# Altium PCB dnt_mko.PcbDoc (part 2 of 2)
Units mm, origin at the board's own origin, x right, y up, seen from the top; angles counter-clockwise.
Board outline 128.25 x 60.25 mm, 6 copper layers (Top Layer, Signal Layer 1, Signal Layer 2, GND plane, Power layer, Bottom Layer), stack 1.5 mm thick; 122 components, 105 nets, 539 pads, 282 vias.
Unrouted connection lines stored in the file: 1.
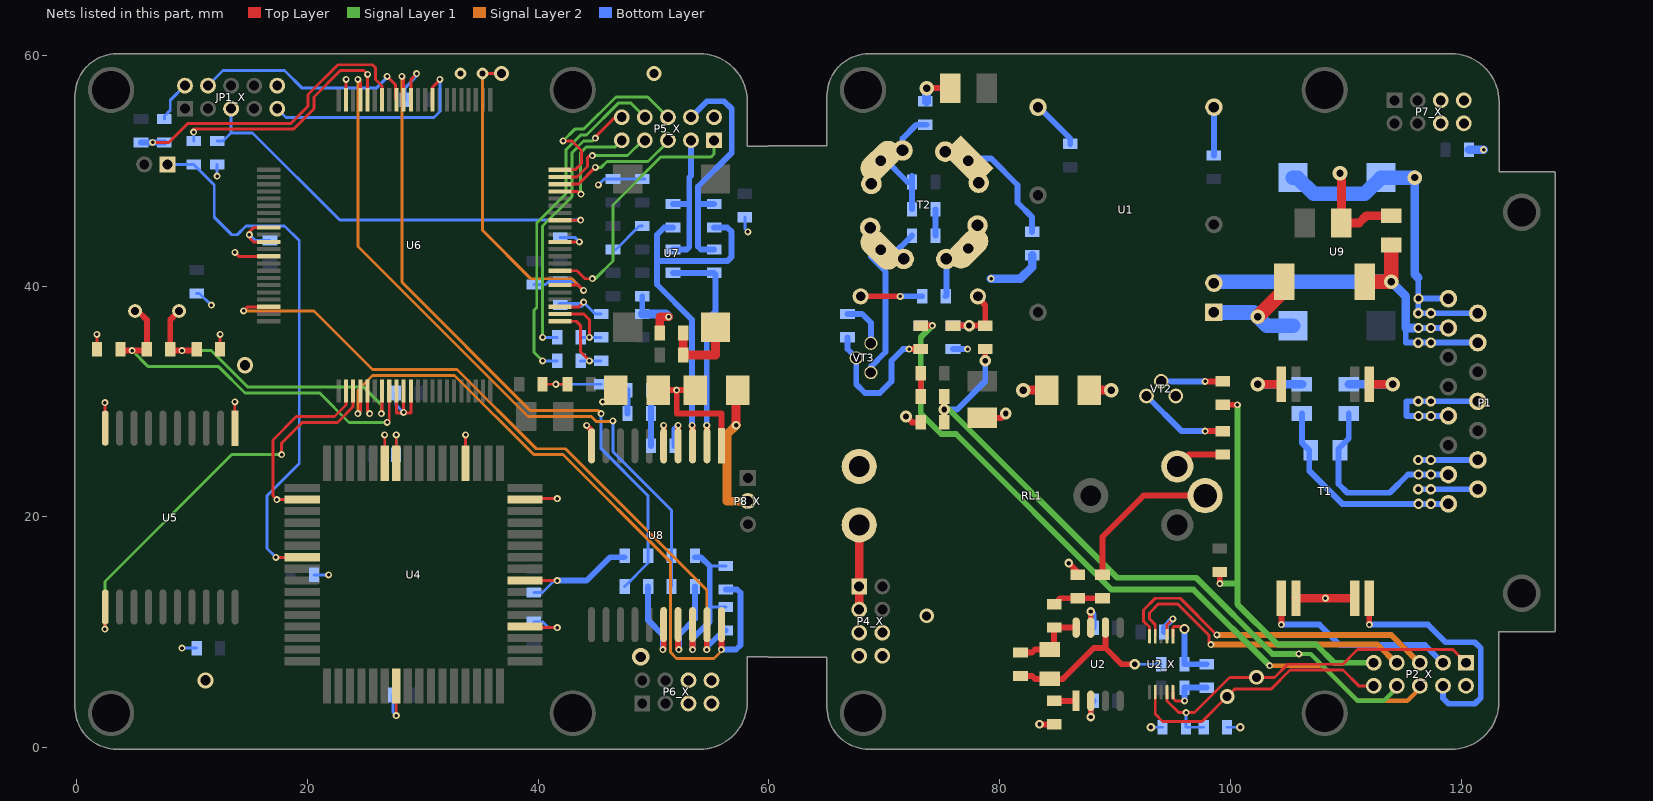
[diagram p6: the nets of this part, all layers, seen from the top]

## Via types
v1: diameter 0.61, hole 0.305, Top Layer to Bottom Layer, 176 vias
v2: diameter 0.889, hole 0.508, Top Layer to Bottom Layer, 31 vias
v3: diameter 1.524, hole 0.889, Top Layer to Bottom Layer, 22 vias
v4: diameter 1.27, hole 0.762, Top Layer to Bottom Layer, 12 vias
v5: diameter 0.762, hole 0.381, Top Layer to Bottom Layer, 10 vias
v6: diameter 1.27, hole 0.635, Top Layer to Bottom Layer, 10 vias
v7: diameter 1, hole 1, Top Layer to Bottom Layer, 9 vias
v8: diameter 1.016, hole 0.508, Top Layer to Bottom Layer, 5 vias
v9: diameter 1.27, hole 0.61, Top Layer to Bottom Layer, 3 vias
v10: diameter 1.397, hole 0.889, Top Layer to Bottom Layer, 2 vias
v11: diameter 3.048, hole 2.032, Top Layer to Bottom Layer, 1 vias
v12: diameter 1.016, hole 0.635, Top Layer to Bottom Layer, 1 vias

## Nets (pads, with @x,y where several pads share a name; then routed paths per layer and width w, separated by ;. In a path a pad name is that pad's centre, name@x,y a point inside that pad or via, vN(x,y) a via of type N, cw(c..) or ccw(c..) an arc to the next point about the centre after c; other vN are vias at no path point) (continued)
ALE: U5.11 U6.69 | length 36.3
  Top Layer w0.254: v1@2.466,10.234 v1(2.466,10.287) U5.11@2.466,12.694 ; v1(17.78,25.4) 17.78,26.416 19.558,28.194 22.606,28.194 23.972,29.56 U6.69@23.972,30.895
  Signal Layer 1 w0.254: v1(2.466,10.287) 2.466,14.404 13.462,25.4 v1(17.78,25.4)
BS+27: P1.8 P1.15 U9.11 U9.17 | length 31.3
  Bottom Layer w0.508: 116.256,40.716 v2(116.256,37.643) v2(117.348,37.643) P1.15@121.412,37.643 ; v2(116.281,38.913) P1.8@118.872,38.913
  Bottom Layer w0.762: v6(115.951,49.403) 115.951,41.021 116.256,40.716
  Bottom Layer w1.27: U9.11@105.41,49.403 105.791,49.403 107.188,48.006 111.633,48.006 U9.17@113.03,49.403 v6(115.951,49.403)
BS-27: C6.2 C46.1 P1.7 P1.14 U1.2 | length 36.6
  Top Layer w1.27: C6.2@111.633,40.386 v6(113.919,40.386) 113.919,43.434 C46.1@113.792,43.561
  Bottom Layer w0.508: 115.176,36.373 115.176,35.103 v2(116.256,35.103) v2(117.348,35.103) P1.14@121.412,35.103 ; v2@116.256,36.347 v2(116.281,36.373) v2(117.348,36.373) P1.7@118.872,36.373
  Bottom Layer w0.762: v6(113.919,40.386) 115.176,39.129 115.176,36.373 v2(116.281,36.373)
  Bottom Layer w1.27: U1.2@98.628,40.259 98.755,40.386 v6(113.919,40.386)
DNT_CURRENT: P2_X.10 U2_X.7 | length 23.5
  Top Layer w0.254: U2_X.7@93.472,4.826 93.472,2.921 94.107,2.286 97.536,2.286 v4(99.695,4.445) 100.33,5.08 103.505,5.08 105.156,6.731 109.728,6.731 111.093,5.366 P2_X.10@112.396,5.366
DNT_CURRENT_MK: P5_X.10 R29.1 | length 23.3
  Top Layer w0.254: v1(44.958,52.832) 44.958,52.926 P5_X.10@46.61,54.578
  Signal Layer 1 w0.254: v1(40.386,35.56) 40.386,45.212 42.926,47.752 42.926,51.562 43.942,52.578 44.704,52.578 v1(44.958,52.832)
  Bottom Layer w0.254: v1(40.386,35.56) R29.1@41.656,35.56
GEN: C31.2 P2_X.6 R25.1 | length 63.5
  Top Layer w0.508: C31.2@73.152,36.576 v1(74.168,36.576)
  Signal Layer 1 w0.508: v1(74.168,36.576) 73.152,35.56 73.152,28.956 74.93,27.178 76.2,27.178 89.662,13.716 96.774,13.716 v1(103.378,7.112)
  Signal Layer 2 w0.381: v1(103.378,7.112) 107.95,7.112 110.998,4.064 115.316,4.064 115.999,4.747
  Bottom Layer w0.508: R25.1@73.152,36.576 v1(74.168,36.576)
GEN_MK: P5_X.6 U6.22 | length 16.5
  Top Layer w0.254: U6.22@41.91,50.082 43.224,50.082 43.764,50.622 43.764,51.74 42.926,52.578 v1(42.164,52.578)
  Signal Layer 1 w0.254: v1(42.164,52.578) 43.18,53.594 43.942,53.594 46.736,56.388 49.491,56.388 P5_X.6@51.245,54.634
GND: C7.2 C8.1 C9.2 C10.2 C11.1 C12.1 C13.1 C14.1 C15.1 C16.1 C17.1 C18.1 C19.1 C20.1 C21.2 C22.2 C23.2 C24.2 C25.2 C26.2 C33.1 C34.1 C35.1 C36.1 C37.1 C38.1 C39.1 C40.2 C41.2 C42.2 C43.1 C44.1 C45.2 C47.1 C48.2 JP1_X.2 JP1_X.10 L2.1 P2_X.2 P4_X.5 P4_X.6 P4_X.7 P4_X.8 P5_X.2 P6_X.5 P6_X.6 P6_X.7 P6_X.8 P7_X.5 P7_X.6 P7_X.7 P7_X.8 R2.1 R4.1 R16.1 R17.2 R33.1 R36.1 R40.2 R44.2 R45.2 RL1.1 T1.2 T1.3 U2.2 U2.7 U2_X.2 U2_X.10 U4.15 U4.28 U4.32 U4.39 U4.44 U4.50 U4.51 U5.1 U5.10 U6.3 U6.12 U6.34 U6.43 U6.53 U6.55 U6.57 U6.71 U6.75 U6.76 U6.77 U8.5 U8.10 U8.18 VT2.1 | length 154.4
  Top Layer w0.254: C12.1@1.778,34.544 v1(1.778,35.814) ; U5.10@2.466,27.686 v1(2.466,29.898) ; C13.1@12.446,34.544 v1(12.446,35.814) v1@12.446,35.839 ; U5.1@13.716,27.686 v1(13.716,29.972) ; v1(13.716,42.926) 14.06,42.582 U6.57@16.66,42.582 ; U6.55@16.66,43.832 15.35,43.832 14.986,44.196 v1(14.986,44.45) 14.986,44.704 15.364,45.082 U6.53@16.66,45.082 ; U6.43@23.347,56.145 23.347,57.891 v1(23.368,57.912) ; U6.71@25.222,30.895 25.222,29.134 v1(25.4,28.956) ; U4.51@26.708,24.653 v1(26.708,27.104) ; v1(27.708,2.794) U4.15@27.708,5.353 ; U4.50@27.708,24.653 v1(27.708,27.104) ; U6.75@27.722,30.895 27.722,28.992 28.972,28.992 U6.77@28.972,30.895 ; v1(28.347,29.057) U6.76@28.347,30.895 ; U6.34@28.972,56.145 28.972,57.885 v1@29.464,58.376 ; U4.44@33.708,24.653 v1(33.708,27.104) ; U4.28@38.858,10.503 38.947,10.414 v1(41.656,10.414) ; U4.32@38.858,14.503 38.883,14.478 v1(41.656,14.478) ; U4.39@38.858,21.503 38.945,21.59 v1(41.656,21.59) ; C15.1@40.386,31.496 v1(41.529,31.496) C14.1@42.545,31.496 C14.1@42.672,31.496 ; U6.3@41.91,38.207 43.541,38.207 v1(43.942,38.608) ; U6.12@41.91,43.832 v1(43.578,43.832) ; U2_X.2@94.488,9.652 94.488,10.668 v1(94.996,11.176) ; U2_X.10@94.996,4.826 94.996,4.318 95.25,4.064 v1(96.012,4.064)
  Top Layer w0.508: v1(44.196,27.94) 44.63,27.506 U8.10@44.63,26.162 ; C42.2@45.974,30.988 C42.2@46.736,30.988 ; U8.5@50.88,26.162 v1@50.88,27.86 ; v1(53.38,8.509) U8.18@53.38,10.67 U8.18@53.38,11.17 ; v5(83.439,2.032) R40.2@84.709,2.032 ; v5(85.979,16.002) 86.741,15.24 C44.1@86.741,14.986 ; v5(87.884,2.667) U2.2@87.884,4.064 ; U2.7@87.884,10.414 v5(87.884,11.811)
  Top Layer w0.762: R16.1@50.546,36.068 50.546,37.338 v1(51.308,37.338) ; L2.1@87.757,30.988 v6(89.662,30.988) ; T1.3@105.664,12.954 v1(108.204,12.954) T1.2@110.744,12.954
  Bottom Layer w0.254: R33.1@7.62,54.483 7.62,54.737 8.128,55.245 8.128,56.102 JP1_X.2@9.398,57.372 ; v1(9.144,8.636) C21.2@10.414,8.636 ; C37.1@10.414,39.37 10.668,39.37 v1(11.684,38.354) ; v1(12.192,49.53) C26.2@12.192,50.546 ; v1(14.986,44.45) 15.494,43.942 C19.1@16.764,43.942 ; C36.1@20.574,14.986 v1(21.844,14.986) ; C35.1@27.432,4.572 27.432,3.07 v1(27.708,2.794) ; C18.1@27.686,30.734 27.686,29.718 v1(28.347,29.057) ; C16.1@27.708,25.422 v1(27.708,27.104) ; C20.1@28.448,56.134 28.448,57.15 29.464,58.166 v1(29.464,58.42) ; C34.1@39.624,10.922 40.386,10.922 40.894,10.414 v1(41.656,10.414) ; C33.1@39.624,13.462 40.386,13.462 41.427,14.503 41.453,14.478 v1(41.656,14.478) ; v1(41.529,31.496) C39.1@45.466,31.496 ; C17.1@41.91,44.196 43.214,44.196 v1(43.578,43.832) ; v1(43.942,38.608) 44.958,37.592 C40.2@45.466,37.592 ; v1(45.212,48.768) 45.72,49.276 C25.2@46.482,49.276 R17.2@49.022,49.276 R17.2@49.276,49.276 ; 54.864,12.065 54.991,12.192 R45.2@56.261,12.192 ; 54.864,15.748 R44.2@56.261,15.748 ; C22.2@57.912,45.974 57.912,44.958 v1(58.166,44.704) ; v5(93.091,1.778) C48.2@94.107,1.778 ; C47.1@99.695,1.778 v5(100.838,1.778)
  Bottom Layer w0.508: JP1_X.2@9.112,57.372 JP1_X.2@9.398,57.372 ; v1(41.656,14.478) 44.196,14.478 46.228,16.51 R2.1@47.498,16.51 ; C45.2@41.91,38.354 43.688,38.354 v1(43.942,38.608) ; v1(45.593,29.972) 47.752,29.972 ; C38.1@47.752,28.956 47.752,29.972 ; C8.1@47.752,30.988 47.752,29.972 ; C23.2@49.022,37.592 C24.2@49.022,39.116 ; v1(53.38,8.509) 53.38,9.438 54.864,10.922 54.864,12.065 54.864,15.748 54.102,16.51 R4.1@53.594,16.51 ; v5(87.884,2.667) 87.884,3.81 C10.2@88.138,4.064 ; v5(87.884,11.811) 88.138,11.557 C9.2@88.138,10.414 ; C11.1@94.234,10.033 94.234,10.414 v1(94.996,11.176) ; v1(96.012,4.064) C7.2@96.012,5.207 C43.1@97.917,5.207
  Bottom Layer w0.762: C23.2@49.022,37.592 51.054,37.592 v1(51.308,37.338) ; C41.2@120.65,51.816 v1(121.92,51.816)
  other v1: 50.88,27.94
  other v3: 48.895,7.874
  other v4: 73.66,11.43 50.038,58.42
  other v10: 11.176,5.842 14.605,33.147
GND_PWR: C1.1 C2.2 C3.2 C4.1 C27.1 C28.2 C29.2 C32.1 C46.2 L2.2 R26.1 R38.1 U1.4 U1.5 VT3.1 | length 35.9
  Top Layer w0.508: v8(71.882,28.702) 72.39,28.194 C27.1@73.152,28.194 ; v6(73.66,57.15) C4.1@75.692,57.15 ; C28.2@78.486,28.575 80.137,28.575 v8(80.518,28.956)
  Top Layer w0.762: v6(82.042,30.988) L2.2@84.074,30.988 ; C2.2@109.601,45.466 111.125,45.466 111.76,46.101 C46.2@113.792,46.101 ; C2.2@109.601,45.72 v6@109.601,49.657
  Bottom Layer w0.508: R26.1@66.802,37.592 68.072,37.592 68.834,36.83 VT3.1@68.834,35.052 ; C32.1@75.946,34.544 v1(77.216,34.544) ; U1.5@83.388,55.499 86.106,52.781 C3.2@86.106,52.324 ; C1.1@98.552,51.308 U1.4@98.552,55.423
  Bottom Layer w0.762: C29.2@73.66,56.007 v6@73.66,57.023 ; v1(79.248,40.64) 81.788,40.64 82.804,41.656 R38.1@82.804,42.672
  other v6: 109.474,49.784
IND50V: C27.2 P2_X.8 R19.2 R20.1 | length 59.9
  Top Layer w0.508: C27.2@75.184,28.194 v8(75.184,29.312) R19.2@75.184,30.429 ; v8(78.74,33.528) R20.1@78.74,34.544
  Signal Layer 1 w0.381: v1(105.918,8.128) 106.934,8.128 110.998,4.064 113.284,4.064 114.396,5.176 P2_X.8@114.396,5.366
  Signal Layer 1 w0.508: v8(75.184,29.312) 75.59,29.312 90.17,14.732 97.028,14.732 103.632,8.128 v1(105.918,8.128)
  Bottom Layer w0.508: v8(75.184,29.312) 76.302,29.312 78.74,31.75 v8(78.74,33.528)
IND50V_MK: P5_X.8 R28.1 | length 30.1
  Signal Layer 1 w0.254: v1(40.386,33.528) 39.624,34.29 39.624,37.89 39.878,38.144 39.878,45.466 42.418,48.006 42.418,51.816 43.688,53.086 44.188,53.086 46.982,55.88 48.006,55.88 P5_X.8@49.248,54.638
  Bottom Layer w0.254: v1(40.386,33.528) R28.1@41.656,33.528
INPUT: P4_X.1 P4_X.3 RL1.2 | length 7.3
  Top Layer w0.762: P4_X.3@67.818,11.97 P4_X.1@67.818,13.97 RL1.2@67.818,19.304
KS: P1.4 P1.12 | length 11.1
  Bottom Layer w0.508: P1.4@118.872,28.753 v2(117.348,28.753) v2(116.281,28.753) 115.24,28.753 115.24,30.023 v2(116.256,30.023) v2(117.348,30.023) P1.12@121.412,30.023
KU0: P2_X.7 U2_X.4 | length 26.4
  Top Layer w0.254: U2_X.4@93.472,9.652 93.472,10.668 92.964,11.176 92.964,11.684 93.726,12.446 95.421,12.446 98.12,9.746 98.12,9.119 v1(98.298,8.941)
  Signal Layer 2 w0.508: v1(98.298,8.941) 112.725,8.941 P2_X.7@114.348,7.318
KU0_MK: P5_X.7 U6.21 | length 8.8
  Top Layer w0.254: U6.21@41.91,49.457 43.361,49.457 44.272,50.368 44.272,51.13 44.397,51.255
  Signal Layer 1 w0.254: v1(44.704,51.308) 47.752,51.308 49.078,52.634 P5_X.7@49.245,52.634
KU1: P2_X.5 U2_X.5 | length 29.2
  Top Layer w0.254: U2_X.5@92.964,9.652 92.964,10.458 92.456,10.966 92.456,11.938 93.472,12.954 95.631,12.954 v1(98.806,9.779)
  Signal Layer 2 w0.508: v1(98.806,9.779) 113.919,9.779 P2_X.5@116.364,7.334
KU1_MK: P5_X.5 U6.20 | length 11
  Top Layer w0.254: U6.20@41.91,48.832 43.498,48.832 v1(44.958,50.292)
  Signal Layer 1 w0.254: v1(44.958,50.292) 45.466,50.292 45.974,50.8 49.53,50.8 51.245,52.515 P5_X.5@51.245,52.634
M_RXD0: R4.2 R9.1 U6.41 | length 61.2
  Top Layer w0.254: v1(24.384,57.912) 24.597,57.699 U6.41@24.597,56.145
  Signal Layer 2 w0.254: v1(24.384,57.912) 24.384,43.434 39.116,28.702 44.602,28.702 45.034,28.27 46.431,28.27 v1(46.482,28.321)
  Bottom Layer w0.254: v1(46.482,28.321) 46.482,25.654 51.562,20.574 R4.2@51.562,16.637 R9.1@51.562,13.97
M_RXDN0: R2.2 R6.1 U6.35 | length 59.6
  Top Layer w0.254: v1(28.194,58.166) 28.247,58.166 28.347,58.267 U6.35@28.347,56.145
  Signal Layer 2 w0.254: v1(28.194,58.166) 28.194,40.342 39.326,29.21 45.212,29.21 v1(45.466,28.956)
  Bottom Layer w0.254: v1(45.466,28.956) 45.466,25.908 49.53,21.844 R2.2@49.53,16.637 49.53,16.002 R6.1@47.498,13.97
M_TXD0: R45.1 U6.64 U8.19 | length 62.3
  Top Layer w0.254: v1(14.478,37.846) 14.839,38.207 U6.64@16.66,38.207
  Top Layer w0.508: v1(54.61,8.509) 54.61,10.65 U8.19@54.63,10.67
  Signal Layer 2 w0.254: v1(14.478,37.846) 20.574,37.846 25.654,32.766 32.976,32.766 39.834,25.908 42.374,25.908 54.61,13.672 v1(54.61,8.509)
  Bottom Layer w0.5: v1(54.61,8.509) 54.631,8.53 54.631,8.72 56.07,10.16 R45.1@56.261,10.16
M_TXDN0: R44.1 U6.70 U8.20 | length 61.1
  Top Layer w0.254: v1(24.384,28.956) 24.597,29.169 U6.70@24.597,30.895
  Top Layer w0.508: v1(55.88,8.509) U8.20@55.88,10.67
  Signal Layer 2 w0.254: v1(24.384,28.956) 24.384,30.988 25.654,32.258 32.766,32.258 39.624,25.4 42.164,25.4 51.486,16.078 51.486,8.25 51.989,7.747 55.245,7.747 55.88,8.382 v1(55.88,8.509)
  Bottom Layer w0.5: v1(55.88,8.509) 57.15,8.509 57.531,8.89 57.531,13.423 57.238,13.716 R44.1@56.261,13.716
MKO_1: P5_X.3 R42.2 R43.2 | length 12.2
  Bottom Layer w0.5: R43.2@51.689,43.18 52.872,43.18 53.086,43.394 53.086,47.117 ; R42.2@51.689,47.117 53.086,47.117 ; P5_X.3@53.245,52.634 53.245,49.562 53.086,49.403 53.086,47.117
MKO_1_OA: P2_X.3 T1.4 | length 17.6
  Top Layer w0.508: v1(104.394,10.668) T1.4@104.394,12.954
  Bottom Layer w0.508: v1(104.394,10.668) 107.696,10.668 109.474,8.89 116.84,8.89 P2_X.3@118.38,7.35
MKO_2: P5_X.4 R41.2 R46.2 | length 20.4
  Bottom Layer w0.5: P5_X.4@53.245,54.634 54.618,56.007 56.134,56.007 56.769,55.372 56.769,51.562 53.848,48.641 53.848,47.117 ; R46.2@55.245,43.18 54.102,43.18 53.848,43.434 53.848,47.117 ; R41.2@55.245,47.117 53.848,47.117
MKO_2_OA: P2_X.4 T1.1 | length 21.9
  Top Layer w0.508: v1(112.014,10.668) T1.1@112.014,12.954
  Bottom Layer w0.508: v1(112.014,10.668) 117.094,10.668 118.618,9.144 121.158,9.144 121.666,8.636 121.666,4.318 121.158,3.81 118.872,3.81 118.396,4.286 P2_X.4@118.396,5.366
MKO_N: P1.1 R5.2 R10.2 | length 18.5
  Bottom Layer w0.508: R5.2@106.172,28.956 106.172,26.416 106.807,25.781 106.807,24.003 109.677,21.133 v2(116.281,21.133) v2(117.348,21.133) P1.1@118.872,21.133
MKO_N_R: P1.9 | length 5.2
  Bottom Layer w0.508: v2(116.256,22.403) v2(117.348,22.403) P1.9@121.412,22.403
MKO_P: P1.2 R10.1 R30.2 | length 17
  Bottom Layer w0.508: R30.2@110.236,28.956 110.236,26.797 109.347,25.908 109.347,22.86 110.109,22.098 113.792,22.098 115.367,23.673 v2(116.281,23.673) v2(117.348,23.673) P1.2@118.872,23.673
  Bottom Layer w1.27: P1.2@118.821,23.622 P1.2@118.872,23.673
MKO_P_R: P1.10 | length 5.2
  Bottom Layer w0.508: v2(116.256,24.943) v2(117.348,24.943) P1.10@121.412,24.943
NetC5_1: C5.1 R3.2 R39.2 U2.6 | length 15.8
  Top Layer w0.508: C5.1@81.788,6.223 82.804,6.223 83.058,5.969 R3.2@84.328,5.969 85.471,5.969 88.138,8.636 89.154,8.636 ; U2.6@89.154,10.414 89.154,8.636 ; v2(91.694,7.239) 90.551,7.239 89.154,8.636
  Bottom Layer w0.254: v2(91.694,7.239) R39.2@93.98,7.239
NetC5_2: C5.2 R3.1 R8.2 U2.8 | length 6.6
  Top Layer w0.508: C5.2@81.788,8.255 82.804,8.255 83.058,8.509 R3.1@84.328,8.509 84.709,8.89 R8.2@84.709,10.414 U2.8@86.614,10.414
NetC6_1: C6.1 U1.1 U9.8 | length 11.5
  Top Layer w1.27: v6(102.362,37.338) 104.648,39.624 C6.1@104.648,40.386 C6.1@104.648,40.64
  Bottom Layer w1.27: U1.1@98.628,37.719 101.981,37.719 v6(102.362,37.338) 103.124,36.576 U9.8@105.41,36.576
NetC12_2: C12.2 Q1.1 R11.2 U6.74 | length 33.7
  Top Layer w0.254: Q1.1@5.08,37.846 Q1.1@5.334,37.846 ; v1(26.924,28.194) 27.102,28.372 27.102,30.89 U6.74@27.097,30.895
  Top Layer w0.508: C12.2@3.81,34.417 v1(4.826,34.417) 6.096,34.417 R11.2@6.096,34.544 6.096,37.084 Q1.1@5.334,37.846
  Signal Layer 1 w0.254: v1(4.826,34.417) 6.223,33.02 12.319,33.02 14.605,30.734 21.082,30.734 23.622,28.194 v1(26.924,28.194)
NetC13_2: C13.2 Q1.2 R11.1 U6.73 | length 28.1
  Top Layer w0.254: v1(26.416,28.956) 26.472,29.012 U6.73@26.472,30.895
  Top Layer w0.508: Q1.2@8.89,37.846 8.128,37.084 R11.1@8.128,34.544 8.128,34.417 v1(9.144,34.417) C13.2@10.516,34.417
  Signal Layer 1 w0.254: v1(9.144,34.417) 11.684,34.417 14.859,31.242 24.892,31.242 26.416,29.718 v1(26.416,28.956)
NetC29_1: C29.1 C30.1 R21.2 T2.2 | length 10.9
  Bottom Layer w0.508: T2.2@68.834,51.054 69.977,51.054 72.009,49.022 R21.2@72.39,49.022 ; T2.2@71.57,51.754 71.57,52.774 72.771,53.975 C29.1@73.533,53.975 C29.1@73.66,53.975 ; C30.1@72.39,46.66 R21.2@72.39,49.022 ; R21.2@72.39,49.53 R21.2@72.39,49.022
NetC30_2: C30.2 R23.1 | length 2.3
  Bottom Layer w0.508: R23.1@74.422,44.374 C30.2@74.422,46.66
NetC31_1: C31.1 R25.2 R26.2 VT3.2 | length 13.9
  Top Layer w0.508: v1(72.136,34.544) C31.1@73.152,34.544
  Bottom Layer w0.508: R26.2@66.802,35.56 66.802,34.544 VT3.2@67.564,33.782 67.564,31.496 68.326,30.734 69.596,30.734 70.612,31.75 70.612,33.528 71.628,34.544 v1(72.136,34.544) R25.2@73.152,34.544
NetC32_2: C32.2 R20.2 R27.2 VD3.1 | length 7
  Top Layer w0.508: R27.2@75.946,36.576 v8(77.343,36.576) R20.2@78.74,36.576 78.74,38.354 VD3.1@77.978,39.116
  Bottom Layer w0.508: C32.2@75.946,36.576 v8(77.343,36.576)
NetC39_2: C39.2 R28.2 U6.1 | length 7.1
  Top Layer w0.254: U6.1@41.91,36.957 43.297,36.957 43.688,36.566 43.688,34.29 v1(44.45,33.528)
  Bottom Layer w0.254: R28.2@43.688,33.528 v1(44.45,33.528) C39.2@45.466,33.528
NetC40_1: C40.1 R29.2 U6.2 | length 6
  Top Layer w0.254: U6.2@41.91,37.582 43.952,37.582 44.45,37.084 v1(44.45,35.56)
  Bottom Layer w0.254: R29.2@43.688,35.56 v1(44.45,35.56) C40.1@45.466,35.56
NetC43_2: C43.2 R39.1 U2_X.1 | length 6.8
  Top Layer w0.254: U2_X.1@94.996,9.652 94.996,10.414 95.072,10.49 95.682,10.49 95.885,10.287 v2(96.012,10.287)
  Bottom Layer w0.508: v2(96.012,10.287) R39.1@96.012,7.239 C43.2@97.917,7.239
NetC44_2: C44.2 R7.1 R8.1 | length 4.4
  Top Layer w0.508: R8.1@84.709,12.446 85.217,12.954 C44.2@86.741,12.954 R7.1@88.9,12.954
NetL3_1: L3.1 P8_X.2 | length 11.6
  Top Layer w0.762: v5(57.15,27.94) L3.1@57.15,30.861
  Signal Layer 2 w0.762: v5(57.15,27.94) 56.356,27.146 56.356,21.368 P8_X.2@58.166,21.368
NetR1_1: R1.1 U8.4 | length 3.6
  Top Layer w0.508: U8.4@52.13,26.162 v1@52.13,27.88
  Bottom Layer w0.508: R1.1@51.816,26.162 51.816,27.626 v1(52.13,27.94)
NetR5_1: R5.1 T1.5 | length 5.8
  Top Layer w0.762: v6(102.362,31.496) T1.5@104.394,31.496
  Bottom Layer w0.762: v6(102.362,31.496) R5.1@106.172,31.496
NetR6_2: R6.2 U8.16 | length 8.2
  Top Layer w0.508: v1(50.8,8.509) 50.88,8.589 U8.16@50.88,10.67
  Bottom Layer w0.508: R6.2@49.53,13.97 49.53,11.049 50.8,9.779 v1(50.8,8.509)
NetR7_2: R7.2 RL1.3 | length 13.7
  Top Layer w0.508: R7.2@88.9,14.986 88.9,18.288 92.456,21.844 RL1.3@97.79,21.844
NetR9_2: R9.2 U8.17 | length 8.7
  Top Layer w0.508: U8.17@52.13,11.17 U8.17@52.13,10.67 52.13,8.576 v1(52.197,8.509)
  Bottom Layer w0.508: v1(52.197,8.509) 52.197,9.779 53.594,11.176 R9.2@53.594,13.97
NetR13_2: R13.2 R16.2 U7.17 | length 7.5
  Top Layer w0.762: R13.2@52.578,33.782 R13.2@52.578,34.036 ; R16.2@52.578,36.068 R16.2@52.578,35.941 R13.2@52.578,34.036 ; U7.17@55.372,36.449 55.372,34.036 R13.2@52.578,34.036
NetR14_2: R14.2 R15.1 | length 3.4
  Bottom Layer w0.254: R15.1@46.482,43.18 46.736,43.18 48.768,45.212 R14.2@49.022,45.212
NetR18_2: R18.2 R19.1 | length 2
  Top Layer w0.508: R19.1@73.152,30.429 R18.2@73.152,32.461
NetR22_1: R22.1 U6.40 | length 21.1
  Top Layer w0.254: v1(10.16,53.34) 10.16,53.594 18.796,53.594 20.574,55.372 20.574,56.388 22.86,58.674 24.892,58.674 v1(25.222,58.344) U6.40@25.222,56.145
  Bottom Layer w0.254: R22.1@10.16,52.578 v1(10.16,53.34)
NetR23_2: R23.2 T2.3 VT3.3 | length 15.4
  Bottom Layer w0.508: VT3.3@68.834,32.512 68.834,33.02 70.104,34.29 70.104,41.275 68.834,42.545 70.561,42.545 R23.2@72.39,44.374
NetR24_2: R24.2 R33.2 U6.38 | length 27.8
  Top Layer w0.254: v1(6.604,52.451) 8.001,52.451 9.652,54.102 18.586,54.102 20.066,55.582 20.066,56.598 22.65,59.182 25.654,59.182 25.908,58.928 25.908,58.628 ; 25.908,58.628 25.908,58.059 25.908,57.912 26.472,57.348 U6.38@26.472,56.145
  Bottom Layer w0.508: R24.2@5.588,52.451 v1(6.604,52.451) R33.2@7.62,52.451
NetR30_1: R30.1 T1.8 | length 5.8
  Top Layer w0.762: T1.8@112.014,31.496 v6(114.046,31.496)
  Bottom Layer w0.762: R30.1@110.236,31.496 v6(114.046,31.496)
NetR31_1: R31.1 RL1.B | length 4.4
  Top Layer w0.508: RL1.B@95.377,24.384 96.393,25.4 R31.1@99.314,25.4
NetR31_2: R31.2 VT2.3 | length 7.9
  Top Layer w0.508: v1(97.79,27.432) R31.2@99.314,27.432
  Bottom Layer w0.508: VT2.3@92.71,30.48 95.758,27.432 v1(97.79,27.432)
NetR34_1: R34.1 VT2.2 | length 5.3
  Top Layer w0.508: v1(97.79,31.75) R34.1@99.314,31.75
  Bottom Layer w0.508: VT2.2@93.98,31.75 v1(97.79,31.75)
NetR37_1: R37.1 VD3.2 | length 5.5
  Top Layer w0.508: VD3.2@67.818,39.116 VD3.2@67.945,39.116 v1(71.374,39.116)
  Bottom Layer w0.508: v1(71.374,39.116) R37.1@73.279,39.116
NetR37_2: R37.2 T2.4 | length 3.4
  Bottom Layer w0.508: R37.2@75.311,39.116 75.37,39.175 T2.4@75.37,42.354 ; T2.4@77.47,42.545 T2.4@77.597,42.672
NetR38_2: R38.2 T2.1 | length 9.6
  Bottom Layer w0.508: T2.1@77.47,51.054 79.248,51.054 81.534,48.768 81.534,47.244 82.804,45.974 R38.2@82.804,44.704
NetR40_1: R40.1 U2.1 | length 1.7
  Top Layer w0.508: R40.1@84.963,4.064 U2.1@86.614,4.064
NetR41_1: R41.1 R42.1 U8.3 | length 31.6
  Top Layer w0.508: U8.3@53.38,26.162 v1@53.38,27.9
  Bottom Layer w0.508: R42.1@51.689,45.085 50.927,45.085 50.292,44.45 50.292,42.164 ; v1(53.34,27.94) 53.34,37.084 50.292,40.132 50.292,42.164 ; R41.1@55.245,45.085 56.388,45.085 56.769,44.704 56.769,42.545 56.388,42.164 50.292,42.164
NetR43_1: R43.1 R46.1 U8.2 | length 18.9
  Top Layer w0.508: U8.2@54.63,26.162 v1@54.63,27.92
  Bottom Layer w0.508: R43.1@51.689,41.148 R46.1@55.245,41.148 55.372,41.021 55.372,37.846 54.61,37.084 v1(54.61,27.94)
RXD1: JP1_X.9 U6.31 | length 19.5
  Top Layer w0.254: U6.31@30.847,56.145 30.847,57.238 31.496,57.887 v1(31.496,57.912)
  Bottom Layer w0.254: JP1_X.9@17.398,55.372 18.16,54.61 30.988,54.61 31.496,55.118 v1(31.496,57.912)
TEMP_1: C45.1 R32.1 R36.2 U6.6 | length 33.1
  Top Layer w0.254: R36.2@35.179,58.42 v4(36.83,58.42) ; U6.6@41.91,40.082 43.484,40.082 v1(43.942,39.624)
  Signal Layer 2 w0.254: R36.2@35.179,58.42 35.179,44.831 39.37,40.64 42.926,40.64 v1(43.942,39.624)
  Bottom Layer w0.254: R32.1@39.624,40.132 40.64,40.132 40.894,40.386 C45.1@41.91,40.386 43.18,40.386 v1(43.942,39.624)
TXD1: JP1_X.4 U6.36 | length 19.8
  Top Layer w0.254: v1(26.924,58.166) 27.658,57.432 27.658,56.209 U6.36@27.722,56.145
  Bottom Layer w0.254: JP1_X.4@11.398,57.118 JP1_X.4@11.398,57.372 12.7,58.674 18.034,58.674 19.558,57.15 25.981,57.15 26.924,58.093 v1(26.924,58.166)
UNLOCK: P2_X.9 R34.2 R35.2 | length 35
  Top Layer w0.508: v1(99.06,14.224) R35.2@99.06,15.24 ; R34.2@99.314,29.718 v1(100.584,29.718)
  Signal Layer 1 w0.508: v1(99.06,14.224) 100.584,14.224 ; v1(100.584,29.718) 100.584,14.224 ; P2_X.9@112.396,7.366 108.966,7.366 107.391,8.941 104.089,8.941 100.584,12.446 100.584,14.224
UNLOCK_MK: P5_X.9 U6.19 | length 9.5
  Top Layer w0.254: U6.19@41.91,48.207 43.487,48.207 v1(43.714,47.98)
  Signal Layer 1 w0.254: v1(43.714,47.98) 43.688,48.006 43.688,51.562 44.196,52.07 46.681,52.07 P5_X.9@47.245,52.634
V_MID_MK: P5_X.1 U6.8 | length 22.1
  Top Layer w0.254: U6.8@41.91,41.332 43.377,41.332 44.069,40.64 v1(44.704,40.64)
  Signal Layer 1 w0.254: v1(44.704,40.64) 44.958,40.64 46.482,42.164 46.482,47.034 50.629,51.181 54.991,51.181 55.245,51.435 P5_X.1@55.245,52.634
V_mid_OA: C47.2 C48.1 P2_X.1 U2_X.9 | length 32.6
  Top Layer w0.254: U2_X.9@94.488,4.826 94.488,4.064 95.504,3.048 v1(96.139,3.048) 96.861,3.048 99.909,6.096 v4(102.235,6.096) 103.803,6.096 104.946,7.239 109.728,7.239 110.998,8.509 119.253,8.509 P2_X.1@120.396,7.366
  Bottom Layer w0.254: v1(96.139,3.048) C48.1@96.139,1.778 C47.2@97.663,1.778
VCC: C8.2 C38.2 C42.1 L3.2 R1.2 U8.1 | length 18.9
  Top Layer w0.508: C42.1@50.419,30.988 v1(52.006,30.988) ; L3.2@53.594,30.988 v1(52.006,30.988) ; U8.1@55.88,26.162 55.88,28.956 52.006,28.956 v1(52.006,30.988)
  Bottom Layer w0.508: R1.2@49.784,26.162 C38.2@49.784,28.956 C8.2@49.784,30.988 v1(52.006,30.988)
~RD: U4.58 U6.68 | length 16.3
  Top Layer w0.254: U4.58@19.558,21.503 v1(17.359,21.503) 17.018,21.844 17.018,26.67 19.05,28.702 22.352,28.702 23.347,29.697 U6.68@23.347,30.895
~RST: C26.1 JP1_X.5 U6.15 | length 38.8
  Top Layer w0.254: U6.15@41.91,45.707 43.701,45.707 v1(43.688,45.72)
  Bottom Layer w0.254: C26.1@12.192,52.578 12.7,52.578 13.398,53.276 ; JP1_X.5@13.398,55.372 13.398,53.276 ; v1(43.688,45.72) 22.816,45.72 15.26,53.276 13.398,53.276
~WR: P3_X.1 R22.2 U4.63 | length 47.6
  Top Layer w0.254: v1(17.279,16.503) U4.63@19.558,16.503
  Bottom Layer w0.254: P3_X.1@7.874,50.546 R22.2@10.16,50.546 11.938,48.768 11.938,45.974 13.462,44.45 13.924,44.45 14.686,45.212 18.034,45.212 19.304,43.942 19.304,24.638 16.51,21.844 16.51,17.272 v1(17.279,16.503)
pads on no net: JP1_X.1 JP1_X.3 JP1_X.6 JP1_X.7 JP1_X.8 P1.0 P1.3 P1.5 P1.6 P1.11 P1.13 RL1.0 T1.6 T1.7 U1.7 U4.9 U4.10 U4.11 U4.12 U4.13 U4.14 U4.18 U4.22 U4.23 U4.24 U4.25 U4.26 U4.41 U4.42 U4.43 U4.46 U4.47 U4.48 U4.49 U4.53 U4.54 U4.55 U4.56 U4.57 U4.64 U6.4 U6.5 U6.7 U6.9 U6.14 U6.16 U6.17 U6.18 U6.23 U6.24 U6.25 U6.26 U6.27 U6.28 U6.29 U6.30 U6.32 U6.37 U6.39 U6.42 U6.44 U6.45 U6.54 U6.72 U6.79 U6.80 U6.81 U6.82 U6.83 U6.84 U6.85 U6.87 U6.88 U8.6 U8.7 U8.8 U8.9 U8.11 U8.12 U8.13 U8.14 U8.15 U9.2
copper on no net: | length 33
  Top Layer w0.254: 41.91,41.957 43.895,41.957 v1(44.196,41.656) ; 41.91,46.957 v1(43.909,46.957)
  Top Layer w1.27: 43,57 44.42,58.42 v4(47.752,58.42)
  Bottom Layer w0.508: v2(116.256,27.483) v2(117.348,27.483) 121.412,27.483 ; v2(116.256,32.563) v2(117.348,32.563) 121.412,32.563 ; v2(116.281,26.213) v2(117.348,26.213) 118.872,26.213 ; v2(116.281,31.293) v2(117.348,31.293) 118.872,31.293 ; v2(116.281,33.833) v2(117.348,33.833) 118.872,33.833
  Bottom Layer w1.27: 43,57 44.42,58.42 v4@47.621,58.42
  other v3: 51.816,1.397 55.245,1.778 118.364,2.032 120.396,2.032 82.042,16.51 90.932,16.51 118.618,17.018 121.666,17.78 82.042,27.178 90.932,27.178 73.533,41.783 2.032,44.196 11.684,44.196 118.364,44.196 121.412,44.196 101.6,48.006 73.533,52.451 52.578,57.912 55.372,57.912 120.142,58.039 116.459,58.547
  other v4: 103.124,55.118
  other v7: 125.123,17.454 125.123,20.454 125.123,23.454 125.123,26.454 125.123,29.344 125.123,32.344 125.123,35.44 125.123,38.44 125.123,41.44
  other v11: 2.413,50.927
  other v12: 6.858,56.134

## Polygon pours and split planes (outlines as drawn)
GND_PWR on GND plane (split plane): 111.377,53.34 111.386,53.29 111.414,53.248 115.187,49.476 115.187,34.852 115.008,34.673 103.378,34.673 103.328,34.664 103.286,34.636 100.784,32.133 87.63,32.133 87.58,32.124 87.538,32.096 83.512,28.069 65.661,28.069 65.661,50.165 65.652,50.265 65.623,50.36 65.575,50.449 65.512,50.526 65.435,50.589 65.407,50.604 65.407,51.817 65.448,51.867 65.495,51.955 65.524,52.051 65.534,52.15 65.534,56.5 65.534,56.704 65.587,57.109 65.693,57.504 65.85,57.882 66.054,58.235 66.104,58.301 66.85,59.047 66.916,59.097 67.269,59.301 67.647,59.458 68.042,59.564 68.447,59.617 111.377,59.617
GND on GND plane (split plane): 236 vertices, not listed, extent 0.383,0.383 127.617,59.617

## Other copper
Top Layer:
  text "Temp" at 39.624,55.118 h1.02 r90
  text "GND" at 16.002,32.385 h1.02
  text "-50" at 71.374,15.24 h1.02
  text "-5" at 76.2,15.24 h1.02
  text "GND" at 71.628,9.144 h1.02
  text "+5" at 76.2,9.144 h1.02
  text "+5" at 43.18,7.112 h1.02
  text "2" at 100.711,6.985 h1.02
  text "GND" at 6.985,5.207 h1.02
  text "1" at 100.584,3.302 h1.02
  text "DNT MKO #03" at 5.969,1.016 h1.02
  text "DNT MKO #03" at 71.12,1.016 h1.02
  text "3V3" at 36.576,0.889 h1.02
Bottom Layer:
  text "DNT MKO #03" at 16.764,1.016 h1.02
  text "DNT MKO #03" at 81.915,1.016 h1.02
GND plane (plane layer: these items are gaps in the copper):
  lines w0.254: 65.278,27.94 83.566,27.94 87.63,32.004 100.838,32.004 103.378,34.544 115.062,34.544 115.316,34.798 115.316,49.53 111.506,53.34 111.506,60.127 111.435,60.198 67.818,60.198 65.278,57.658 65.278,27.94

## Silkscreen, mask and mechanical layers (free items; w line width, h text height)
Mechanical 1:
  lines w0.254: 119.123,0 ccw(c119.123,4) 123.123,4 123.123,10.093 123.19,10.16 128,10.16 128,49.784 123.19,49.784 123.126,49.848 123.126,56 ccw(c119.126,56) 119.126,60 68.651,60 ccw(c68.651,56.5) 65.151,56.5 65.151,3.5 ccw(c68.651,3.5) 68.651,0 119.38,0 ; 0,3.5 ccw(c3.5,3.5) 3.5,0 54,0 ccw(c54,4) 58,4 58,8 58.04,8 60,8 60,52 58,52 58,56 ccw(c54,56) 54,60 3.5,60 ccw(c3.5,56.5) 0,56.5 0,3.5
  lines w0.3: 60,8 65.151,8 ; 60,10.16 65.151,10.16 ; 60,50.165 65.151,50.165 ; 60,52 65.151,52
Mechanical 2:
  lines w0.254: -7.366,4.572 -6.858,3.048 ; -7.366,55.524 -6.858,57.048 ; -7.112,3.048 -6.604,3.048 ; -7.112,57.048 -6.604,57.048 ; -7.064,3 -1.27,3 ; -6.858,24.944 -6.858,3.048 ; -6.858,35.152 -6.858,57.048 ; -6.35,4.572 -6.858,3.048 ; -6.35,55.524 -6.858,57.048 ; -1.318,57.048 -6.858,57.048 ; 0,65.746 0,66.254 ; 1.524,65.492 0,66 ; 1.524,66.508 0,66 ; 2.997,61.214 2.997,61.722 ; 4.521,60.96 2.997,61.468 ; 4.521,61.976 2.997,61.468 ; 19.798,61.468 2.997,61.468 ; 25.801,66 0,66 ; 26.197,61.468 42.997,61.468 ; 32.199,66 58,66 ; 41.473,60.96 42.997,61.468 ; 41.473,61.976 42.997,61.468 ; 42.997,61.214 42.997,61.722 ; 56.476,65.492 58,66 ; 56.476,66.508 58,66 ; 58,-2.96 58,66 ; 58,65.746 58,66.254 ; 65.123,58.067 65.123,63.754 ; 65.123,63.5 65.123,64.008 ; 65.123,66.04 65.123,66.548 ; 65.123,67.818 65.123,68.326 ; 66.647,63.246 65.123,63.754 ; 66.647,64.262 65.123,63.754 ; 66.647,65.786 65.123,66.294 ; 66.647,66.802 65.123,66.294 ; 66.647,67.564 65.123,68.072 ; 66.647,68.58 65.123,68.072 ; 68.148,57.003 68.148,61.468 ; 68.148,61.214 68.148,61.722 ; 69.672,60.96 68.148,61.468 ; 69.672,61.976 68.148,61.468 ; 84.949,61.468 68.148,61.468 ; 90.923,68.072 65.123,68.072 ; 91.348,61.468 108.148,61.468 ; 91.923,66.294 65.123,66.294 ; 93.423,63.754 65.123,63.754 ; 97.322,68.072 123.123,68.072 ; 98.322,66.294 125.123,66.294 ; 99.822,63.754 128.123,63.754 ; 106.624,60.96 108.148,61.468 ; 106.624,61.976 108.148,61.468 ; 108.148,61.214 108.148,61.722 ; 108.151,3 139.906,3 ; 115.164,4.558 115.672,3.034 ; 115.164,28.51 115.672,30.034 ; 115.418,3.034 115.926,3.034 ; 115.418,30.034 115.926,30.034 ; 115.672,11.43 115.672,3.034 ; 115.672,21.638 115.672,30.034 ; 115.672,30 135,30 ; 116.18,4.558 115.672,3.034 ; 116.18,28.51 115.672,30.034 ; 121.599,67.564 123.123,68.072 ; 121.599,68.58 123.123,68.072 ; 123.123,0.051 123.123,68.072 ; 123.123,67.818 123.123,68.326 ; 123.599,65.786 125.123,66.294 ; 123.599,66.802 125.123,66.294 ; 125.123,10.16 125.123,66.294 ; 125.123,66.04 125.123,66.548 ; 126.599,63.246 128.123,63.754 ; 126.599,64.262 128.123,63.754 ; 128.123,63.5 128.123,64.008 ; 128.27,49.784 128.27,64.008 ; 128.346,38.938 133.477,38.938 133.477,21.158 133.452,21.133 128.397,21.133 ; 139.192,4.524 139.7,3 ; 139.192,55.476 139.7,57 ; 139.446,3 139.954,3 ; 139.446,57 139.954,57 ; 139.7,24.896 139.7,3 ; 139.7,35.104 139.7,57 ; 140.208,4.524 139.7,3 ; 140.208,55.476 139.7,57 ; 140.355,57.003 108.148,57.003 108.148,61.468
  text "58mm" at 91.177,67.158 h1.52
  text "60mm" at 92.177,65.38 h1.52
  text "58mm" at 26.055,65.086 h1.52
  text "63mm" at 93.677,62.84 h1.52
  text "40mm" at 20.052,60.554 h1.52
  text "40mm" at 85.203,60.554 h1.52
  text "54 (mm)" at -5.944,25.198 h1.52 r90
  text "54 (mm)" at 140.614,25.15 h1.52 r90
  text "Connector Side" at 136.144,19.558 h1.52 r90
  text "27 (mm)" at 116.586,11.684 h1.52 r90

## Dimensions
65.151,3.5 to 68.151,3 on Mechanical 2
2,60 to 3,57 on Mechanical 2
1.905,0 to 3,3 on Mechanical 2
2,60 to 1.905,0 on Mechanical 2
0,61 to 60,61 on Mechanical 2
59.944,-0.127 to -0.056,-0.127 on Mechanical 2